# Altium PCB CH564L-R0-1v0.PcbDoc (part 1 of 2)
Units mil, origin at the board's own origin, x right, y up, seen from the top; angles counter-clockwise.
Board outline 2874.02 x 3543.31 mil, 2 copper layers (Top Layer, Bottom Layer); 51 components, 114 nets, 380 pads, 529 vias.
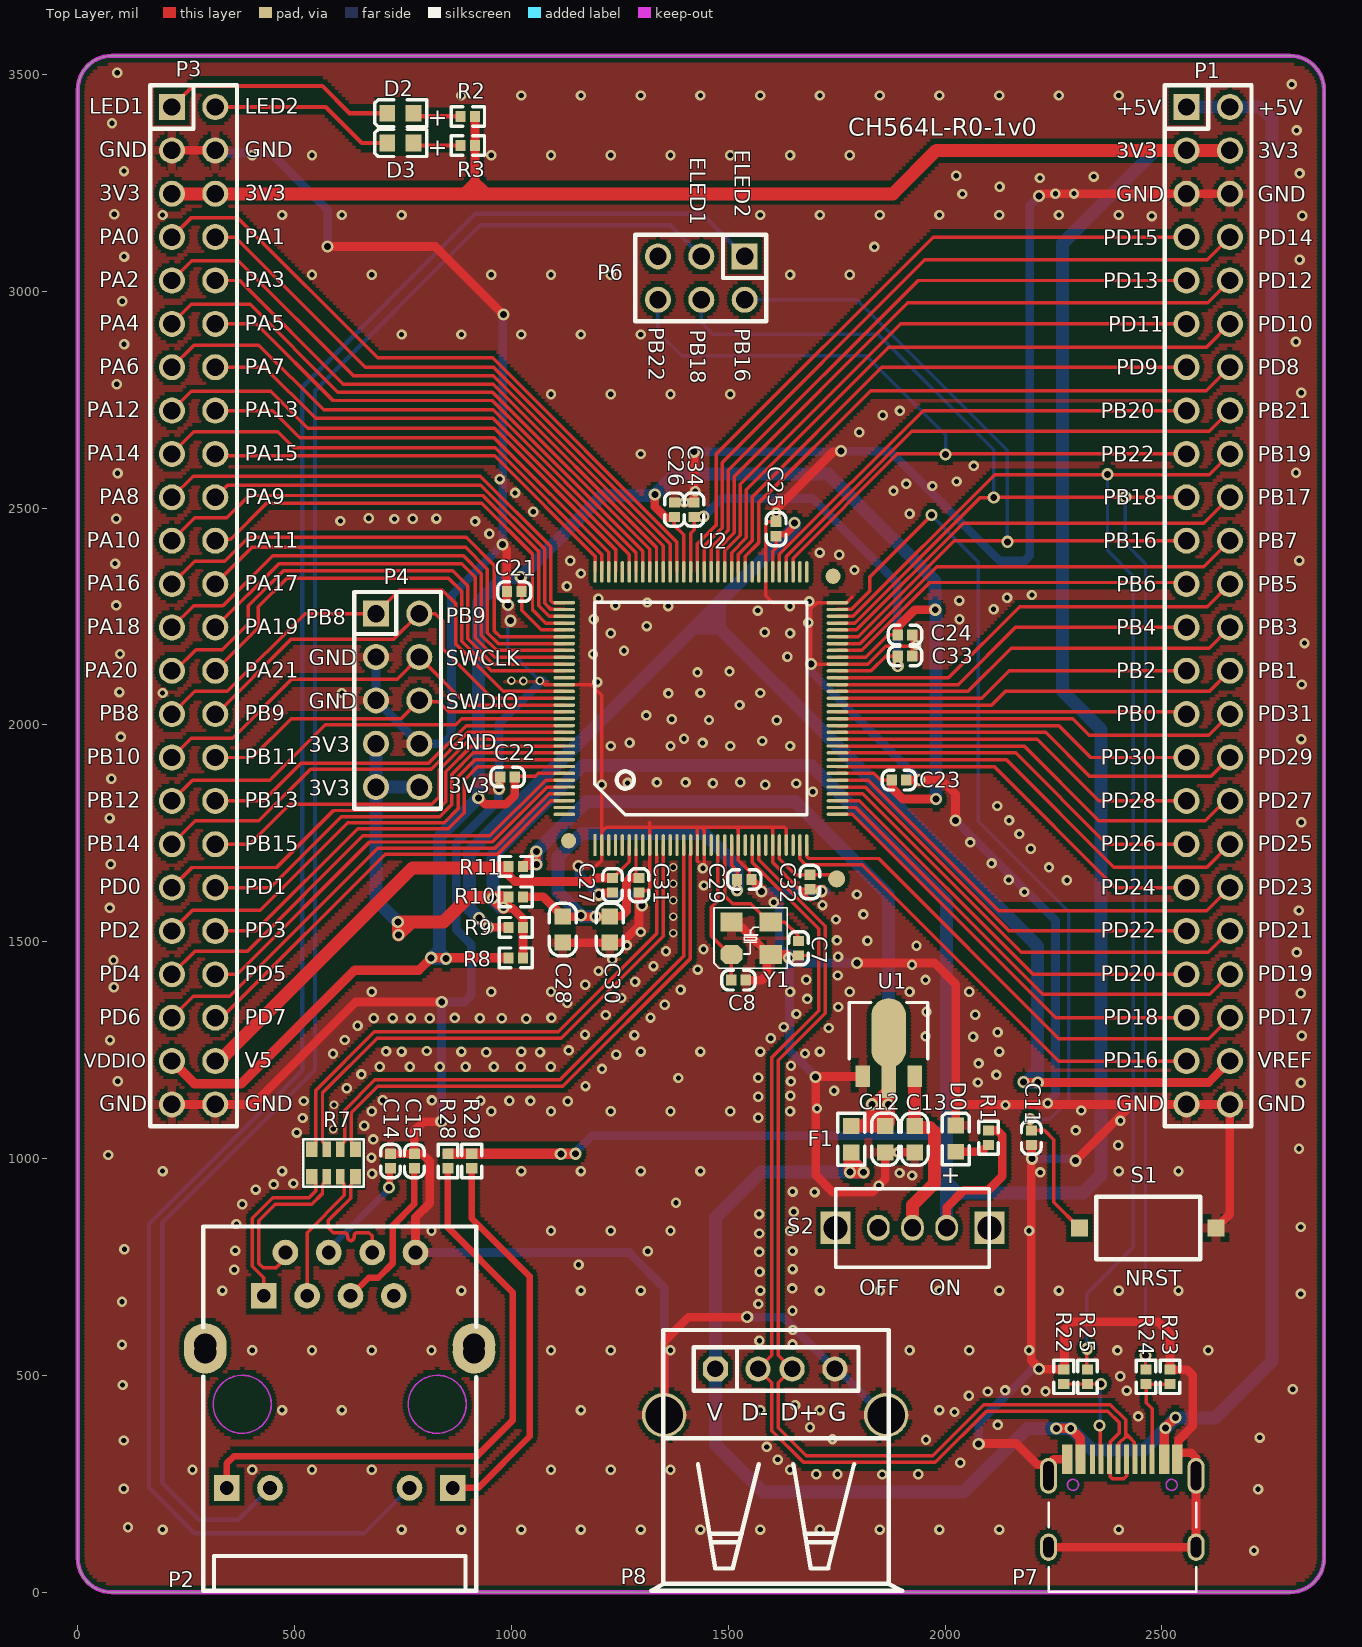
[diagram p0: Top Layer view]
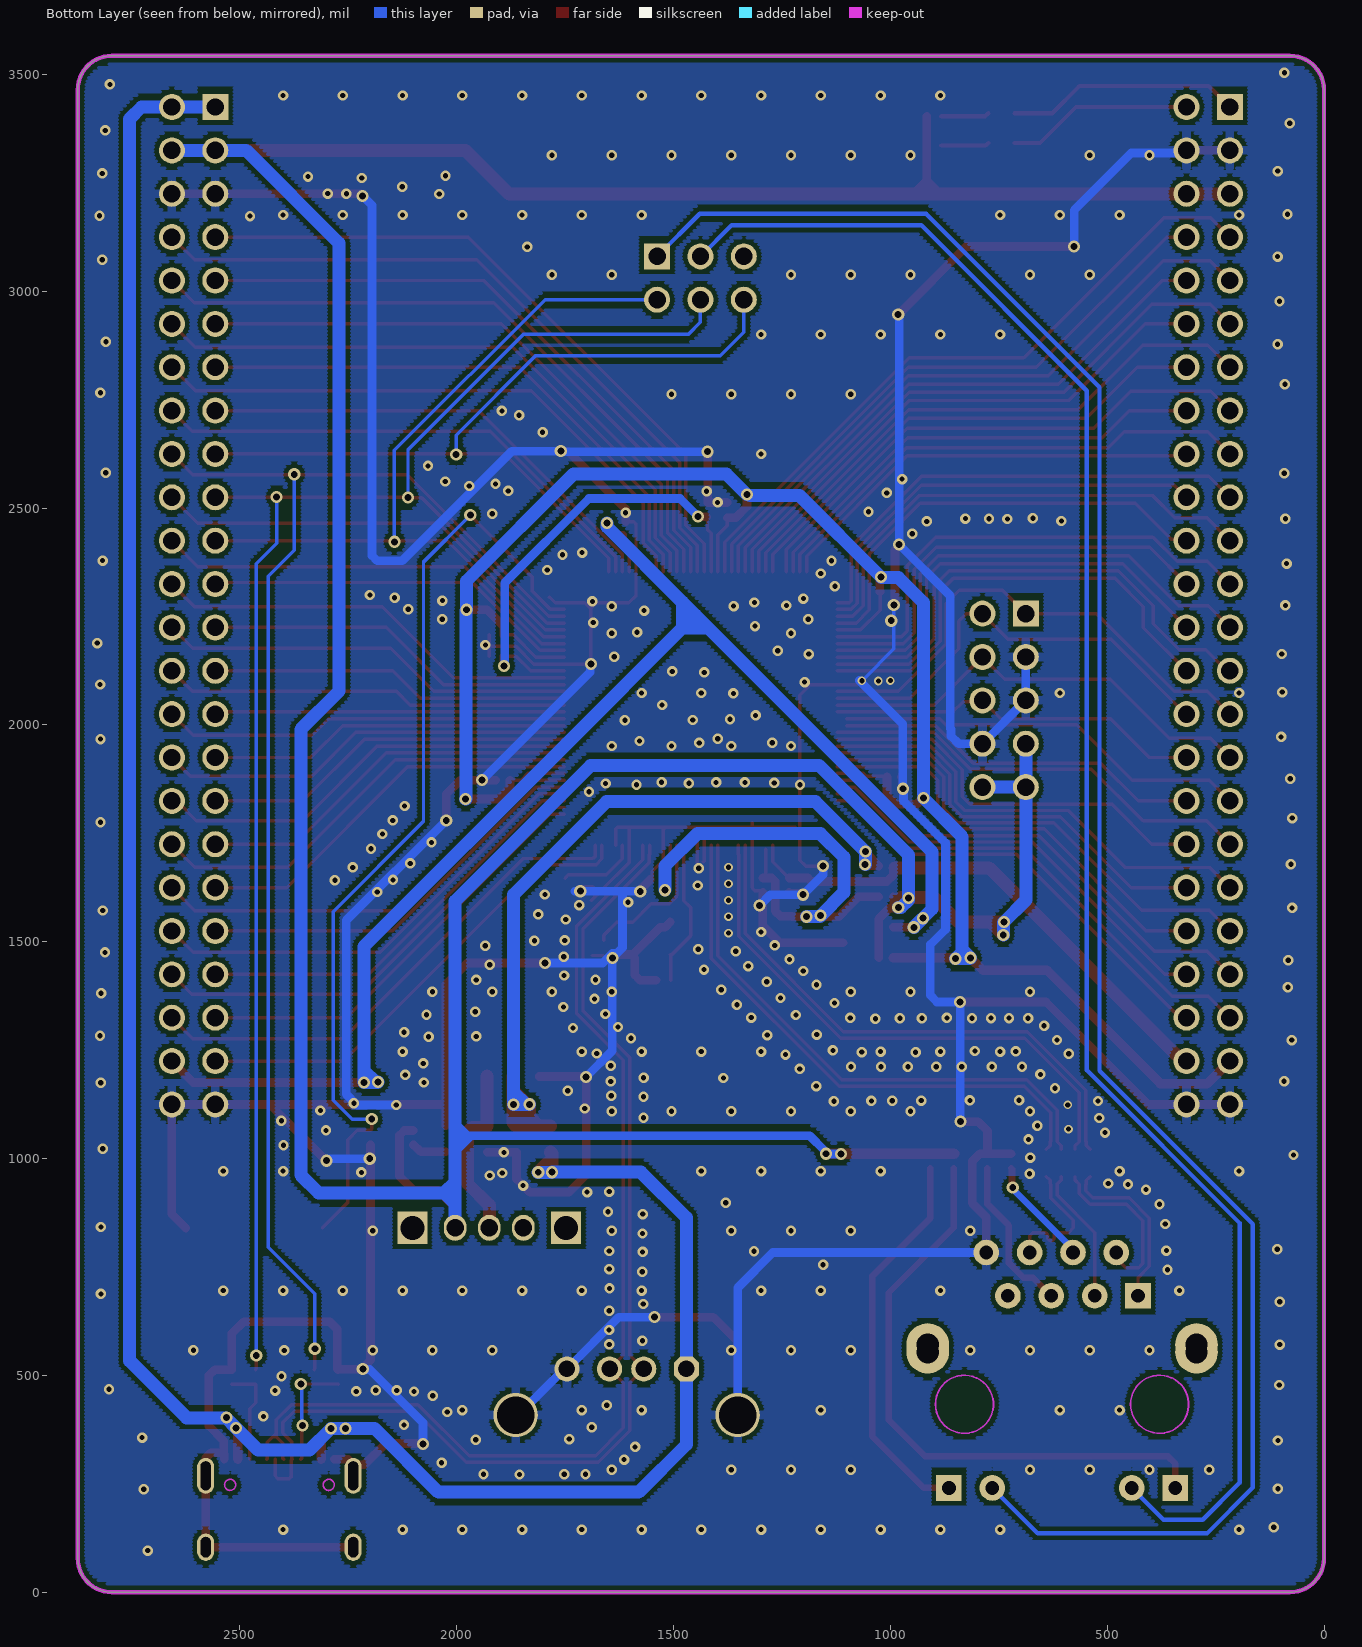
[diagram p1: Bottom Layer view, seen from below]

## Layer stack, top to bottom
Top Solder: solder mask 0.4, Solder Resist, Dk 3.5
Top Layer: signal copper 1.4
Dielectric 1: dielectric 12.6, FR-4, Dk 4.8
Bottom Layer: signal copper 1.4
Bottom Solder: solder mask 0.4, Solder Resist, Dk 3.5

## Board outline
0,78.74 0,3464.57 cw(c78.74,3464.57) 78.74,3543.31 2795.28,3543.31 cw(c2795.28,3464.57) 2874.02,3464.57 2874.02,78.74 cw(c2795.28,78.74) 2795.28,0 78.74,0 cw(c78.74,78.74)

## Design rules (kind name [scope] priority, off if disabled: settings)
Clearance Clearance_1 [InPolygon] p1: gap=10 ignorepadtopadclearanceinfootprint=FALSE
Clearance [All] p2: gap=6 ignorepadtopadclearanceinfootprint=FALSE except(8: Arc-Via Track-Via SMDPad-Via THPad-Via Via-Via Via-Fill Via-Poly Via-Region Via-Hole)
ComponentClearance [All] p1 off: gap=10 collisioncheckmode=3 verticalgap=10 showdistances=FALSE
DiffPairsRouting [All] p1: maxlimit=10 minlimit=7 mostfreqgap=8 toplayer_minwidth=6 toplayer_maxwidth=15 toplayer_prefwidth=8 bottomlayer_minwidth=6 bottomlayer_maxwidth=15 bottomlayer_prefwidth=8 maxuncoupledlength=500
MinimumSolderMaskSliver [All] p1 off: minsoldermaskwidth=10
PolygonConnect PolygonConnect_1 [IsVia] p1: connectstyle=Direct reliefconductorwidth=10 reliefentries=4 polygonreliefangle="90 Angle" airgapwidth=10
PolygonConnect [All] p2: connectstyle=Relief reliefconductorwidth=20 reliefentries=4 polygonreliefangle="90 Angle" airgapwidth=10
RoutingVias [All] p1: holewidth=16 width=28 viastyle="Through Hole" minholewidth=12 minwidth=20 maxholewidth=28 maxwidth=50
SilkToSilkClearance [All] p1 off: silktosilkclearance=10
SilkToSolderMaskClearance [IsPad] p1 off: minsilkscreentomaskgap=10 clearancetoexposedcopper=TRUE
SolderMaskExpansion [All] p1: expansion=2 istentingtop=FALSE
Width [All] p1: maxlimit=100 minlimit=6 preferedwidth=10
25 further rules are at their usual default settings.

## Classes and differential pairs
differential pair PD: +PDM -PDP
differential pair ERX1: +ERXP1 -ERXN1
differential pair ETX: +ETXP -ETXN
differential pair ETX1: +ETXP1 -ETXN1
differential pair ERX: +ERXP -ERXN

## Components (designator, comment, footprint, x,y, rotation, side; value= is the part's Value field where it differs from the comment)
C7 "22pF" 0402_C 1662.32,1468.41 r180 top
C8 "22pF" 0402_C 1540.43,1411.56 r270 top
C11 "0.1uF" 0402_C 2198.97,1031.54 r180 top
C12 "10uF" 0603_C 1862,1075 r270 top
C13 "10uF" 0603_C 1930,1075 r270 top
C14 "1uF" 0402_C 721.24,1011.19 r0 top
C15 "1uF" 0402_C 776.24,977.73 r180 top
C21 "0.1uF" 0402_C 990.02,2307.64 r90 top
C22 "0.1uF" 0402_C 974.53,1880.05 r90 top
C23 "0.1uF" 0402_C 1877.09,1872.78 r90 top
C24 "0.1uF" 0402_C 1891.13,2207.66 r90 top
C25 "0.1uF" 0402_C 1610.59,2434.95 r180 top
C26 "0.1uF" 0402_C 1375.94,2479.74 r180 top
C27 "1uF" 0402_C 1233.27,1613.74 r180 top
C28 "10uF" 0603_C 1118.7,1497.98 r90 top
C29 "0.1uF" 0402_C 1553.91,1643.87 r270 top
C30 "10uF" 0603_C 1227.08,1497.98 r90 top
C31 "0.1uF" 0402_C 1294.27,1613.74 r180 top
C32 "1uF" 0402_C 1688.24,1621.15 r180 top
C33 "0.1uF" 0402_C 1891.13,2158.79 r90 top
C34 "0.1uF" 0402_C 1421.18,2479.74 r180 top
D0 "POWER  red" 0603+ 2025,1015.75 r90 top
D2 "LED1" 0603+ 774.54,3410.84 r180 top
D3 "LED2" 0603+ 774.54,3342.02 r180 top
F1 "500mA" 0603 1784,1014.37 r90 top
P1 "Header 24X2" IDC48-2.54mm 2556.85,3425 r0 top
P2 "HR911105A" HR911105A 428.98,683.58 r0 top
P3 "Header 24X2" IDC48-2.54mm 217.17,3425 r0 top
P4 "Header 5X2" IDC10-2.54mm 687.72,1856.77 r0 top
P6 "HEADER 3x2" IDC6-2.54mm 1538.01,3080.64 r180 top
P7 "TYPE-C" TYPE-C-Receptacle-2.0 2408.82,306.69 r0 top
P8 "USB_A" USBAF 1470.35,515 r0 top
R1 "1K" 0402 2100,1031.54 r90 top
R2 "1K" 0402 916.3,3403.46 r180 top
R3 "1K" 0402 916.3,3336.29 r180 top
R7 "0Ω" RCA-8P4R-0603 590,990 r180 top
R8 "0" 0402 993.4,1463.09 r0 top value=10K
R9 "0" 0402 993.4,1533.4 r0 top value=10K
R10 "NC(0)" 0402 1026.67,1603.72 r180 top value=10K
R11 "0" 0402 993.4,1674.03 r0 top value=10K
R22 "NC(5.1K)" 0402 2273.74,480 r90 top
R23 "NC(5.1K)" 0402 2518.74,480 r90 top
R24 "0Ω" 0402 2463.74,513.46 r270 top
R25 "0Ω" 0402 2328.74,480 r90 top
R28 "1K" 0402 853.6,1011.19 r270 top
R29 "1K" 0402 908.6,1011.19 r270 top
S1 "NRST" SMD_6.1x3.65x2.5mm-KEY 2310.04,840 r0 top
S2 "SW" SW1 1925,840.45 r0 top
U1 "HT7533" SOT-89 1810,1190 r0 top
U2 "CH564L_ALL" LQFP128 1192.91,1723.08 r0 top
Y1 "25M" XT3225 1507.48,1470.67 r0 top

## Footprints (in the part's own frame and the unit in brackets; to place one, negate y for a bottom-side part, rotate by r counter-clockwise, add the part's x,y. Pads: shape width x height; smd on the part's side, far side on the other; paste and mask are expansions set on the pad)
0402 [mm]
  rect 0.6x0.65 smd mask+0.051: 1(0,0) 2(0.85,0)
  silkscreen extent -0.55,-0.58 1.4,0.57
0402_C [mm]
  rect 0.65x0.6 smd mask+0.051: 1(0,0) 2(0,-0.85)
  silkscreen extent -0.58,-1.4 0.57,0.55
0603 [mm]
  rect 0.93x0.98 smd: 1(0,0) 2(1.54,0)
  silkscreen extent -0.76,-0.79 2.3,0.79
0603+ [mm]
  rect 0.93x0.98 smd: 1(0,0) 2(1.54,0)
  silkscreen extent -0.76,-0.79 2.27,0.79
0603_C [mm]
  rect 0.93x0.98 smd mask+0.051: 1(0,0) 2(1.54,0)
  silkscreen extent -0.76,-0.79 2.31,0.79
HR911105A [mm]
  rect 1.5x1.5 hole 0.8: 1(0,0) 9(-2.175,-11.252) 12(11.075,-11.252)
  round 1.5 hole 0.8: 2(1.27,2.54) 3(2.54,0) 4(3.81,2.54) 5(5.08,0) 6(6.35,2.54) 7(7.62,0) 8(8.89,2.54) 10(0.365,-11.252) 11(8.535,-11.252)
  round 2.5 hole 1.3: ""(-3.43,-2.852) ""(-3.43,-3.3) ""(12.32,-3.3) ""(12.32,-2.852)
  Keep-Out Layer circle w0.1: c-1.265,-6.352 r1.7
  Keep-Out Layer circle w0.1: c10.165,-6.352 r1.7
  silkscreen extent -3.55,-17.27 12.45,4.06
IDC6-2.54mm [mil]
  rect 60x60 hole 40: 1(0,0)
  round 60 hole 40: 2(0,100) 3(100,0) 4(100,100) 5(200,0) 6(200,100)
  silkscreen extent -50,-50 252,150
IDC10-2.54mm [mil]
  rect 60x60 hole 40: 1(0,400)
  round 60 hole 40: 2(100,400) 3(0,300) 4(100,300) 5(0,200) 6(100,200) 7(0,100) 8(100,100) 9(0,0) 10(100,0)
  silkscreen extent -50,-50 150,450
IDC48-2.54mm [mil]
  rect 60x60 hole 40: 1(0,0)
  round 60 hole 40: 2(100,0) 3(0,-100) 4(100,-100) 5(0,-200) 6(100,-200) 7(0,-300) 8(100,-300) 9(0,-400) 10(100,-400) 11(0,-500) 12(100,-500) 13(0,-600) 14(100,-600) 15(0,-700) 16(100,-700) 17(0,-800) 18(100,-800) 19(0,-900) 20(100,-900) 21(0,-1000) 22(100,-1000) 23(0,-1100) 24(100,-1100) 25(0,-1200) 26(100,-1200) 27(0,-1300) 28(100,-1300) 29(0,-1400) 30(100,-1400) 31(0,-1500) 32(100,-1500) 33(0,-1600) 34(100,-1600) 35(0,-1700) 36(100,-1700) 37(0,-1800) 38(100,-1800) 39(0,-1900) 40(100,-1900) 41(0,-2000) 42(100,-2000) 43(0,-2100) 44(100,-2100) 45(0,-2200) 46(100,-2200) 47(0,-2300) 48(100,-2300)
  silkscreen extent -50,-2350 150,50
LQFP128 [mm]
  round 0.889 smd: 0(-1.546,0.254) 0(13.946,15.746)
  rect 0.2x1.27 smd mask+0.051: 1(0,0)
  oval 0.2x1.27 smd mask+0.051: 2(0.4,0) 3(0.8,0) 4(1.2,0) 5(1.6,0) 6(2,0) 7(2.4,0) 8(2.8,0) 9(3.2,0) 10(3.6,0) 11(4,0) 12(4.4,0) 13(4.8,0) 14(5.2,0) 15(5.6,0) 16(6,0) 17(6.4,0) 18(6.8,0) 19(7.2,0) 20(7.6,0) 21(8,0) 22(8.4,0) 23(8.8,0) 24(9.2,0) 25(9.6,0) 26(10,0) 27(10.4,0) 28(10.8,0) 29(11.2,0) 30(11.6,0) 31(12,0) 32(12.4,0) 65(12.4,16) 66(12,16) 67(11.6,16) 68(11.2,16) 69(10.8,16) 70(10.4,16) 71(10,16) 72(9.6,16) 73(9.2,16) 74(8.8,16) 75(8.4,16) 76(8,16) 77(7.6,16) 78(7.2,16) 79(6.8,16) 80(6.4,16) 81(6,16) 82(5.6,16) 83(5.2,16) 84(4.8,16) 85(4.4,16) 86(4,16) 87(3.6,16) 88(3.2,16) 89(2.8,16) 90(2.4,16) 91(2,16) 92(1.6,16) 93(1.2,16) 94(0.8,16) 95(0.4,16) 96(0,16)
  oval 1.27x0.2 smd mask+0.051: 33(14.2,1.8) 34(14.2,2.2) 35(14.2,2.6) 36(14.2,3) 37(14.2,3.4) 38(14.2,3.8) 39(14.2,4.2) 40(14.2,4.6) 41(14.2,5) 42(14.2,5.4) 43(14.2,5.8) 44(14.2,6.2) 45(14.2,6.6) 46(14.2,7) 47(14.2,7.4) 48(14.2,7.8) 49(14.2,8.2) 50(14.2,8.6) 51(14.2,9) 52(14.2,9.4) 53(14.2,9.8) 54(14.2,10.2) 55(14.2,10.6) 56(14.2,11) 57(14.2,11.4) 58(14.2,11.8) 59(14.2,12.2) 60(14.2,12.6) 61(14.2,13) 62(14.2,13.4) 63(14.2,13.8) 64(14.2,14.2) 97(-1.8,14.2) 98(-1.8,13.8) 99(-1.8,13.4) 100(-1.8,13) 101(-1.8,12.6) 102(-1.8,12.2) 103(-1.8,11.8) 104(-1.8,11.4) 105(-1.8,11) 106(-1.8,10.6) 107(-1.8,10.2) 108(-1.8,9.8) 109(-1.8,9.4) 110(-1.8,9) 111(-1.8,8.6) 112(-1.8,8.2) 113(-1.8,7.8) 114(-1.8,7.4) 115(-1.8,7) 116(-1.8,6.6) 117(-1.8,6.2) 118(-1.8,5.8) 119(-1.8,5.4) 120(-1.8,5) 121(-1.8,4.6) 122(-1.8,4.2) 123(-1.8,3.8) 124(-1.8,3.4) 125(-1.8,3) 126(-1.8,2.6) 127(-1.8,2.2) 128(-1.8,1.8)
  silkscreen extent -0.01,1.79 12.41,14.21
RCA-8P4R-0603 [mm]
  rect 0.65x0.9 smd mask+0.051: 1(-1.28,-0.8) 4(1.28,-0.8) 5(1.28,0.8) 8(-1.28,0.8)
  rect 0.5x0.9 smd mask+0.051: 2(-0.4,-0.8) 3(0.4,-0.8) 6(0.4,0.8) 7(-0.4,0.8)
  silkscreen extent -1.78,-1.4 1.78,1.4, body extent -1.6,-0.8 1.6,0.8, height 0.6
SMD_6.1x3.65x2.5mm-KEY [mm]
  rect 1x1 smd: 1(0,0) 2(8,0)
  silkscreen extent 0.98,-1.83 7.08,1.83
SOT-89 [mil]
  rect 34x50 smd: 1(0,0) 3(120,0)
  rect 34x100 smd: 2(60,0)
  oval 80x160 smd: ""(60,100)
  silkscreen extent -31,40 151,170
SW1 [mm]
  rect 1.75x1.9 hole 1.4: 0(-4.5,0) 0(4.5,0)
  oval 1.321x1.524 hole 1.016: 1(0,0) 2(-2,0) 3(2,0)
  silkscreen extent -4.51,-2.31 4.5,2.29
TYPE-C-Receptacle-2.0 [mm]
  oval 1x1.6 hole 0.6 slot 1.2 at 90 deg: 0(-4.32,-5.15) 0(4.32,-5.15)
  oval 1x2.1 hole 0.6 slot 1.7 at 90 deg: 0(-4.32,-0.97) 0(4.32,-0.97)
  rect 0.6x1.75 smd mask+0.051: A1(-3.225,0) A4(-2.45,0) B1(3.225,0) B4(2.45,0)
  rect 0.3x1.75 smd mask+0.051: A5(-1.25,0) A6(-0.25,0) A7(0.25,0) A8(1.25,0) B5(1.75,0) B6(0.75,0) B7(-0.75,0) B8(-1.75,0)
  Keep-Out Layer circle w0.1: c2.89,-1.5 r0.325
  Keep-Out Layer circle w0.1: c-2.89,-1.5 r0.325
  silkscreen extent -4.32,-7.75 4.32,-2.55
USBAF [mm]
  round 2.6 hole 2.2: 0(-3,-2.7) 0(10,-2.7)
  oct 1.473x1.473 hole 0.965: 1(0,0)
  round 1.473 hole 0.965: 2(2.5,0) 3(4.5,0) 4(7,0)
  silkscreen extent -3.75,-12.99 10.95,2.29
XT3225 [mm]
  oct 1.3x1.1 smd: 1(0,0)
  rect 1.3x1.1 smd: 2(2.3,0) 3(2.3,1.9) 4(0,1.9)
  silkscreen extent -1.02,-0.8 3.27,2.74

## Part data
C7 C8 C11: library part Cap, "Capacitor", LatestRevisionDate=17-Jul-2002, LatestRevisionNote="Re-released for DXP Platform.", PackageReference=RAD-0.3, Published=8-Jun-2000, Publisher="Altium Limited"
C12 C13 C14 C15: library part CAP, "Capacitor"
C21 C22 C23 C24 C25 C26 C27 C28 C29 C30 C31 C32 C33 C34: library part C0603, "Capacitor", LatestRevisionDate=17-Jul-2002, LatestRevisionNote="Re-released for DXP Platform.", PackageDescription="Radial Cap, Thru-Hole; 2 Leads; 0.3 in Pin Spacing", PackageReference=RAD-0.3, Published=8-Jun-2000, Publisher="Altium Limited"
D0 D2 D3: library part LED0, "Typical INFRARED GaAs LED", LatestRevisionDate=08-Jul-2005, LatestRevisionNote="Mech Layer 1 removed.", PackageReference=LED-0, Published=8-Jun-2000, Publisher="Altium Limited"
F1: library part FUSE1, "Fuse"
P1 P3: "Header, 24-Pin, Dual row", LatestRevisionDate=17-Jul-2002, LatestRevisionNote="Re-released for DXP Platform.", Publisher="Altium Limited"
P4: "Header, 5-Pin, Dual row", LatestRevisionDate=17-Jul-2002, LatestRevisionNote="Re-released for DXP Platform.", Publisher="Altium Limited"
P6: "Header, 3-Pin, Dual row"
P7: library part TYPE-C1
P8: library part USB, "USB Port"
R1 R2 R3: library part "Res Semi", "Semiconductor Resistor"
  R2 R3: LatestRevisionDate=17-Jul-2002, LatestRevisionNote="Re-released for DXP Platform.", PackageReference=AXIAL-0.5, Published=8-Jun-2000, Publisher="Altium Limited"
R7: library part R-8P4R, "贴片网络排阻", BOM名称=贴片网络排阻, 学习资源=www.ooocke.com, 版权归属=源创客
R8 R9 R10 R11 R22 R23 R24 R25: library part Res2, "Resistor"
  R8 R9 R10 R11: LatestRevisionDate=17-Jul-2002, LatestRevisionNote="Re-released for DXP Platform.", PackageReference=AXIAL-0.4, Published=8-Jun-2000, Publisher="Altium Limited"
R28 R29: library part RES
S1: library part KEY
U1: library part 1117-3.3V
U2: "RISC-V MCU with USB OTG 2.0 & 100Mbps Ethernet"
Y1: library part XTAL, "Crystal Oscillator", LatestRevisionDate=17-Jul-2002, LatestRevisionNote="Re-released for DXP Platform.", PackageReference=R38, Published=8-Jun-2000, Publisher="Altium Limited"

## Free pads (board coordinates)
  round 39.37 smd mask+2: 1(1750.22,1645.02)

## Via types
v1: diameter 24, hole 12, Top Layer to Bottom Layer, tented both sides, 447 vias
v2: diameter 28, hole 16, Top Layer to Bottom Layer, tented both sides, 72 vias
v3: diameter 20, hole 12, Top Layer to Bottom Layer, tented both sides, 10 vias

## Nets (pads, with @x,y where several pads share a name; then routed paths per layer and width w, separated by ;. In a path a pad name is that pad's centre, name@x,y a point inside that pad or via, vN(x,y) a via of type N, cw(c..) or ccw(c..) an arc to the next point about the centre after c; other vN are vias at no path point)
3V3: P1.3 P1.4 P3.5 P3.6 P4.7 P4.9 P4.10 R1.2 R2.1 R3.1 R8.2 R9.2 R10.2 R28.1 R29.1 S2.3 | length 10710.6
  Top Layer w20: 889.28,3230.81 891.76,3230.81 916.3,3255.36 ; R2.1@916.3,3403.46 R3.1@916.3,3336.29 916.3,3255.36 ; 923.04,3225 916.3,3231.74 916.3,3255.36 ; 938.37,3230.27 938.37,3233.29 916.3,3255.36 ; 975.52,1602.57 992.05,1602.57 R10.2@993.2,1603.72 991.85,1602.36 991.85,1587.33 983.48,1578.97 v2(981.71,1578.97) ; v2@993.2,1577.44 1002.61,1577.44 1026.86,1553.18 R9.2@1026.86,1533.4 R8.2@1026.86,1463.09 ; S2.3@2003.74,840.45 2003.74,887.37 2043.37,926.99 2099.91,926.99 2132.14,959.23 2132.14,1053.28 2120.43,1065 R1.2@2100,1065
  Top Layer w25: R28.1@853.6,1011.19 R29.1@908.6,1011.19 v2(1148.16,1011.19)
  Top Layer w30: P3.5@217.17,3225 P3.6@317.17,3225 923.04,3225 1880.05,3225 1980.05,3325 P1.3@2556.85,3325 P1.4@2656.85,3325 ; v2@966.82,1593.86 v2(981.71,1578.97) ; 975.52,1602.57 900.28,1602.57 842.99,1545.28 768.95,1545.28 ; 768.95,1545.28 v2(739.68,1516.01) 739.68,1543.08 741.88,1545.28 768.95,1545.28
  Bottom Layer w20: v2(1113.97,1010.51) 1147.48,1010.51 v2(1148.16,1011.19) 1148.16,1013.36 1152.16,1017.36 1152.16,1018.94 1185.68,1052.45 1967.72,1052.45 ; 2003.74,1016.43 1967.72,1052.45 ; 2003.74,1052.45 1975.94,1052.45 ; 2003.74,1080.25 1975.94,1052.45 ; 1967.72,1052.45 1975.94,1052.45
  Bottom Layer w30: P4.7@687.72,1956.77 P4.9@687.72,1856.77 ; v2(739.68,1516.01) 739.68,1544.04 v2(738.11,1545.61) 687.72,1595.99 P4.9@687.72,1856.77 ; P4.10@787.72,1856.77 P4.9@687.72,1856.77 ; v2(981.71,1578.97) 975.42,1578.97 957.85,1596.54 v2(957.85,1601.41) 957.85,1700.06 1164.36,1906.57 1691.34,1906.57 2003.74,1594.17 2003.74,1080.25 2003.74,1052.45 2003.74,1016.43 2003.74,945.82 ; S2.3@2003.74,840.45 2003.74,896.15 ; P1.4@2656.85,3325 P1.3@2556.85,3325 2485.53,3325 2271.39,3110.86 2271.39,2078.1 2359.44,1990.04 2359.44,961.8 2318.63,920.98 2028.57,920.98 ; 2003.74,896.15 2003.74,920.98 ; 2003.74,896.15 2028.57,920.98 ; 2003.74,920.98 2003.74,945.82 ; 2003.74,920.98 2028.57,920.98 ; 2003.74,945.82 2028.57,920.98
5V: C12.1 F1.2 R11.2 U1. U1.2 | length 2049.4
  Top Layer w20: R11.2@1026.86,1674.03 R11.2@1026.86,1674.2 ; v2@1058.19,1679.35 v2@1056.02,1679.35 ; R11.2@1026.86,1674.2 1026.86,1675.01 1055.96,1704.11 1055.96,1706.51 v2(1057.49,1708.04) 1057.84,1707.69 1057.84,1681.17 v2@1056.02,1679.35 ; R11.2@1026.86,1674.2 1028.67,1676.01 1052.68,1676.01 v2@1056.02,1679.35
  Top Layer w30: F1.2@1784,1075 1810.68,1075 ; U1.2@1870,1190 U1.2@1870,1157 ; 1810.68,1075 C12.1@1861.02,1075 ; 1810.68,1075 1831.96,1096.28 v2(1831.96,1125.26) v2@1838.26,1125.26 ; v2@1838.26,1125.26 U1.2@1870,1157 ; v2@1838.26,1125.26 1854.05,1125.26 ; 1854.05,1125.26 1854.05,1082.95 1857.71,1079.29 1857.71,1078.31 C12.1@1861.02,1075 ; 1854.05,1125.26 1869.84,1125.26 v2@1870,1125.1 ; C12.1@1861.02,1075 C12.1@1862,1075 1862.98,1075 1866.29,1078.31 1866.29,1079.29 1870,1083 v2@1870,1125.1 ; v2@1870,1125.1 U1.2@1870,1157
  Bottom Layer w30: v2@1057.49,1678.81 v2(1057.49,1708.04) 1172.77,1823.33 1654.68,1823.33 1869.17,1608.85 1869.17,1153.79 ; 1869.17,1153.79 1840.64,1125.26 v2(1831.96,1125.26) 1832.12,1125.1 v2(1869.17,1125.1) 1869.17,1153.79
  other v2: 1058.19,1678.35
+5V: F1.1 P1.1 P1.2 P7.A4 P7.B4 P8.1 | length 5827.1
  Top Layer w22: v2(2256.61,377.77) 2289.88,377.76 2312.36,355.28 P7.A4@2312.36,306.69 ; P7.B4@2505.28,306.69 v2@2505.28,370.88 ; v2(2508.65,378.49) 2508.65,374.25 v2@2505.28,370.88 ; v2(2531.16,403.14) 2505.28,377.26 v2@2505.28,370.88
  Top Layer w30: F1.1@1784,1014.37 1783.41,1014.96 1780.66,1012.22 1780.66,990.44 ; v2(1812.03,968.54) v2@1811.9,968.67 ; 1780.66,990.44 v2(1780.66,968.67) v2@1811.9,968.67 ; 1780.66,990.44 1790.13,990.44 v2@1811.9,968.67
  Bottom Layer w30: v2@1780.66,968.54 v2(1812.03,968.54) ; v2(1780.66,968.67) 1772.31,968.67 1575.36,968.67 1470.35,863.66 P8.1@1470.35,515 1470.35,340.82 1580.49,230.68 2042.36,230.68 2189.42,377.75 2256.61,377.75 v2(2289.89,377.75) 2339.92,327.72 2457.88,327.72 v2(2508.65,378.49) 2532.23,402.07 2622.8,402.07 2754.28,533.55 2754.28,3397.61 2726.9,3425 P1.2@2656.85,3425 P1.1@2556.85,3425
AVDDK: C32.2 pad.1 U2.28 | length 182.1
  Top Layer w8: U2.28@1618.11,1723.08 1618.11,1691.6 1655.1,1654.61 C32.2@1688.24,1654.61 1742.62,1654.61 pad.1@1750.22,1647.02
CC1: P1.18 R25.2 U2.62 | length 3194.2
  Top Layer w8: U2.62@1751.97,2250.64 1787.73,2250.64 2114.34,2577.24 2609.09,2577.24 P1.18@2656.85,2625 ; v2(2327.35,561.57) 2327.35,514.85 R25.2@2328.74,513.46
  Bottom Layer w8: v2(2327.35,561.57) 2327.35,688.56 2434.49,795.7 2434.49,2343.34 2374.67,2403.17 v2(2374.67,2578.03)
CC2: P1.19 P6.4 R24.1 U2.61 | length 3916
  Top Layer w8: U2.61@1751.97,2234.89 1791.78,2234.89 2081.34,2524.45 2111.85,2524.45 2112.4,2525 P1.19@2556.85,2525 ; v2(2462.27,545.84) 2462.27,514.94 R24.1@2463.74,513.46
  Bottom Layer w8: P6.4@1438.01,2980.64 1438.01,2928.26 1464.77,2901.5 1845.24,2901.5 2112.4,2634.34 v2(2112.4,2524.45) ; v2(2415.49,2526.04) 2415.49,2418.72 2462.27,2371.94 v2(2462.27,545.84)
DVDDK: C33.1 C34.1 U2.54 U2.82 | length 1059.1
  Top Layer w8: U2.82@1413.39,2353 1413.39,2441.7 1421.74,2450.05 1421.74,2471.93 C34.1@1426.37,2476.56 ; U2.54@1751.97,2124.65 1829.26,2124.65 1863.4,2158.79 C33.1@1891.13,2158.79
  Top Layer w20: C34.1@1423.18,2479.74 1423.66,2480.22 1442.85,2480.22 v2(1443.33,2480.7) ; v2(1891,2136) 1891.07,2136.07 1891.07,2158.73 C33.1@1891.13,2158.79
  Bottom Layer w20: v2(1443.33,2480.7) 1443.44,2480.7 1484.94,2522.2 1695.11,2522.2 1889.47,2327.84 v2@1889.47,2138.16
ELED1: P2.10 P6.3 | length 4057.5
  Bottom Layer w10: P2.10@443.35,240.59 370.13,167.37 279.79,167.37 194.65,252.52 194.65,851.54 547.19,1204.08 547.19,2770.92 928.96,3152.68 1365.96,3152.68 P6.3@1438.01,3080.64
ELED2: P2.11 P6.1 | length 4598.5
  Bottom Layer w10: P2.11@765,240.59 660.15,135.74 269.98,135.74 164.23,241.49 164.23,848.95 517.71,1202.43 517.71,2778.93 917.59,3178.81 1439.83,3178.81 P6.1@1538.01,3080.64
ERXN: R7.3 U2.11 | length 1279.8
  Top Layer w8: R7.3@574.25,1021.5 574.25,1029.37 564.43,1039.19 564.43,1151.82 690.26,1277.66 1114.7,1277.66 1350.02,1512.97 1350.02,1701.77 1350.39,1702.14 U2.11@1350.39,1723.08
ERXN1: P2.6 R7.8 | length 314.1
  Top Layer w8: R7.8@640.39,958.5 631.6,949.71 631.6,941.99 629.71,940.1 629.71,909.04 578.21,857.54 578.21,840.25 589.06,829.4 597.02,829.4 600.92,829.4 614.33,829.4 cw(c614.33,821.4) 622.33,821.4 622.33,818.51 ccw(c629.83,818.51) 637.33,818.51 637.33,821.4 cw(c645.33,821.4) 645.33,829.4 649.33,829.4 671.34,829.4 678.98,821.76 P2.6@678.98,783.58
ERXP: R7.4 U2.10 | length 1279.8
  Top Layer w8: R7.4@539.61,1021.5 548.4,1030.29 548.4,1038.87 549.43,1039.9 549.43,1158.04 684.05,1292.66 1108.49,1292.66 1335.02,1519.19 1335.02,1701.77 1334.65,1702.14 U2.10@1334.65,1723.08
ERXP1: P2.3 R7.7 | length 314.1
  Top Layer w8: P2.3@528.98,683.58 528.98,829.52 614.71,915.25 614.71,941.67 605.75,950.63 R7.7@605.75,958.5
ETXN: R7.1 U2.15 | length 1279.9
  Top Layer w8: R7.1@640.39,1021.5 631.6,1030.29 631.6,1038.87 630.57,1039.9 630.57,1105.79 691.54,1166.77 1118.3,1166.77 1413.01,1461.48 1413.01,1701.77 1413.39,1702.14 U2.15@1413.39,1723.08
ETXN1: P2.2 R7.6 | length 402.2
  Top Layer w8: P2.2@478.98,783.58 478.98,770.02 457.33,748.37 427.52,748.37 417.69,758.2 417.69,856.74 455.64,894.69 539.63,894.69 564.43,919.49 564.43,940.81 574.25,950.63 R7.6@574.25,958.5
ETXP: R7.2 U2.14 | length 1279.9
  Top Layer w8: R7.2@605.75,1021.5 605.75,1029.37 615.57,1039.19 615.57,1112.01 685.33,1181.77 1112.08,1181.77 1398.01,1467.69 1398.01,1701.77 1397.64,1702.14 U2.14@1397.64,1723.08
ETXP1: P2.1 R7.5 | length 399.9
  Top Layer w8: P2.1@428.98,683.58 428.98,725.7 402.69,751.99 402.69,862.95 449.42,909.69 533.41,909.69 549.43,925.7 549.43,940.1 548.4,941.13 548.4,949.71 R7.5@539.61,958.5